# EAGLE board Adapter-TSSOP-20 (EAGLE 5.06)
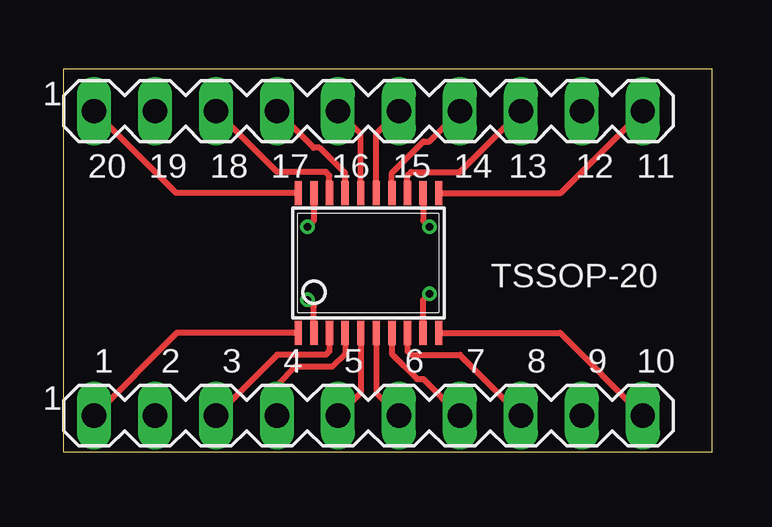
[diagram p0: board, top side]
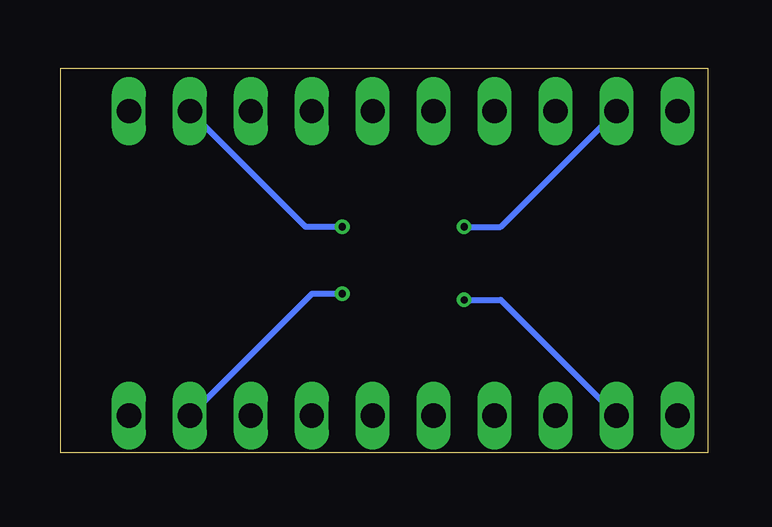
[diagram p1: board, bottom side, seen from below]

Size 27 x 16 mm. Coordinates in mm from the lower left corner, seen from the top.
Outline: 0,0 0,16 27,16 27,0 0,0
Copper layers (1*16): Top 0.035mm / dielectric 1.5mm / Bottom 0.035mm
Design rules "PCB-POOL": minimum track width 6mil, minimum drill 12mil, track to track 6mil, track to pad 6mil, pad to pad 6mil, via to via 6mil, smd to smd 6mil, copper to edge 20mil, drill to drill 8mil, minimum pad ring 8mil, minimum via ring 6mil, stop-mask expansion 3mil, vias tented up to drill 0mil, thermal gap 8mil

## Footprints (pad centres in the part's own frame; a part is rotated, then mirrored left to right if it is on the bottom)
TSSOP20 = smd 0.305 x 0.991: 1 -2.925,-2.918; 2 -2.275,-2.918; 3 -1.625,-2.918; 4 -0.975,-2.918; 5 -0.325,-2.918; 6 0.325,-2.918; 7 0.975,-2.918; 8 1.625,-2.918; 9 2.275,-2.918; 10 2.925,-2.918; 11 2.925,2.918; 12 2.275,2.918; 13 1.625,2.918; 14 0.975,2.918; 15 0.325,2.918; 16 -0.325,2.918; 17 -0.975,2.918; 18 -1.625,2.918; 19 -2.275,2.918; 20 -2.925,2.918
MA10-1 = drill 1.016 long: 1 -11.43,0; 2 -8.89,0; 3 -6.35,0; 4 -3.81,0; 5 -1.27,0; 6 1.27,0; 7 3.81,0; 8 6.35,0; 9 8.89,0; 10 11.43,0

## Placement (x,y rotation side)
E$1  [TSSOP20]  12.7,7.91 0 top
E$2  [MA10-1]  12.7,14.24 0 top
E$3  [MA10-1]  12.7,1.54 0 top

## Library data of the parts
E$1 = ref-packages
E$2 E$3 = con-lstb

## Nets
S$1: E$1.20 E$2.1
S$2: E$1.19 E$2.2
S$3: E$1.18 E$2.3
S$4: E$1.17 E$2.4
S$5: E$1.16 E$2.5
S$6: E$1.15 E$2.6
S$7: E$1.14 E$2.7
S$8: E$1.13 E$2.8
S$9: E$1.12 E$2.9
S$10: E$1.11 E$2.10
S$11: E$1.1 E$3.1
S$12: E$1.2 E$3.2
S$13: E$1.3 E$3.3
S$14: E$1.4 E$3.4
S$15: E$1.5 E$3.5
S$16: E$1.6 E$3.6
S$17: E$1.7 E$3.7
S$18: E$1.8 E$3.8
S$19: E$1.9 E$3.9
S$20: E$1.10 E$3.10

## Tracks (layer width: path | path; a pad name or v marks a point on that pad's centre or on a via)
S$1
  Top 0.254: E$1.20 4.69,10.82 E$2.1
S$2  (via drill 0.3)
  Top 0.254: E$1.19 10.43,9.68 v10.16,9.41
  Bottom 0.254: v10.16,9.41 8.64,9.41 E$2.2
S$3
  Top 0.254: E$1.18 11.07,11.55 10.92,11.7 8.89,11.7 E$2.3
S$4
  Top 0.254: E$1.17 11.72,11.66 10.67,12.72 10.41,12.72 E$2.4
S$5
  Top 0.254: E$1.16 12.38,13.29 E$2.5
S$6
  Top 0.254: E$1.15 13.03,13.29 E$2.6
S$7
  Top 0.254: E$1.14 13.68,11.66 14.99,12.97 15.24,12.97 E$2.7
S$8
  Top 0.254: E$1.13 14.32,11.55 14.48,11.7 16.51,11.7 E$2.8
S$9  (via drill 0.3)
  Top 0.254: E$1.12 14.97,9.68 v15.24,9.41
  Bottom 0.254: v15.24,9.41 16.76,9.41 E$2.9
S$10
  Top 0.254: E$1.11 20.71,10.82 E$2.10
S$11
  Top 0.254: E$1.1 4.72,4.99 E$3.1
S$12  (via drill 0.3)
  Top 0.254: E$1.2 10.43,6.1 v10.16,6.37
  Bottom 0.254: v10.16,6.37 8.64,6.37 E$3.2
S$13
  Top 0.254: E$1.3 11.07,4.23 10.92,4.08 8.89,4.08 E$3.3
S$14
  Top 0.254: E$1.4 11.72,4.12 11.18,3.57 9.65,3.57 8.89,2.81 E$3.4
S$15
  Top 0.254: E$1.5 12.38,2.48 E$3.5
S$16
  Top 0.254: E$1.6 13.03,2.48 E$3.6
S$17
  Top 0.254: E$1.7 13.68,4.12 14.73,3.06 14.99,3.06 E$3.7
S$18
  Top 0.254: E$1.8 14.32,4.23 14.48,4.08 16.51,4.08 E$3.8
S$19  (via drill 0.3)
  Top 0.254: E$1.9 14.97,6.36 v15.24,6.62
  Bottom 0.254: v15.24,6.62 16.51,6.62 E$3.9
S$20
  Top 0.254: E$1.10 20.68,4.99 E$3.10

## Text on the board
tNames: 20 | 19 | 18 | 17 | 16 | 15 | 14 | 13 | 12 | 11 | TSSOP-20 | 1 | 2 | 3 | 4 | 5 | 6 | 7 | 8 | 9 | 10